# EAGLE board board (EAGLE 6.4)
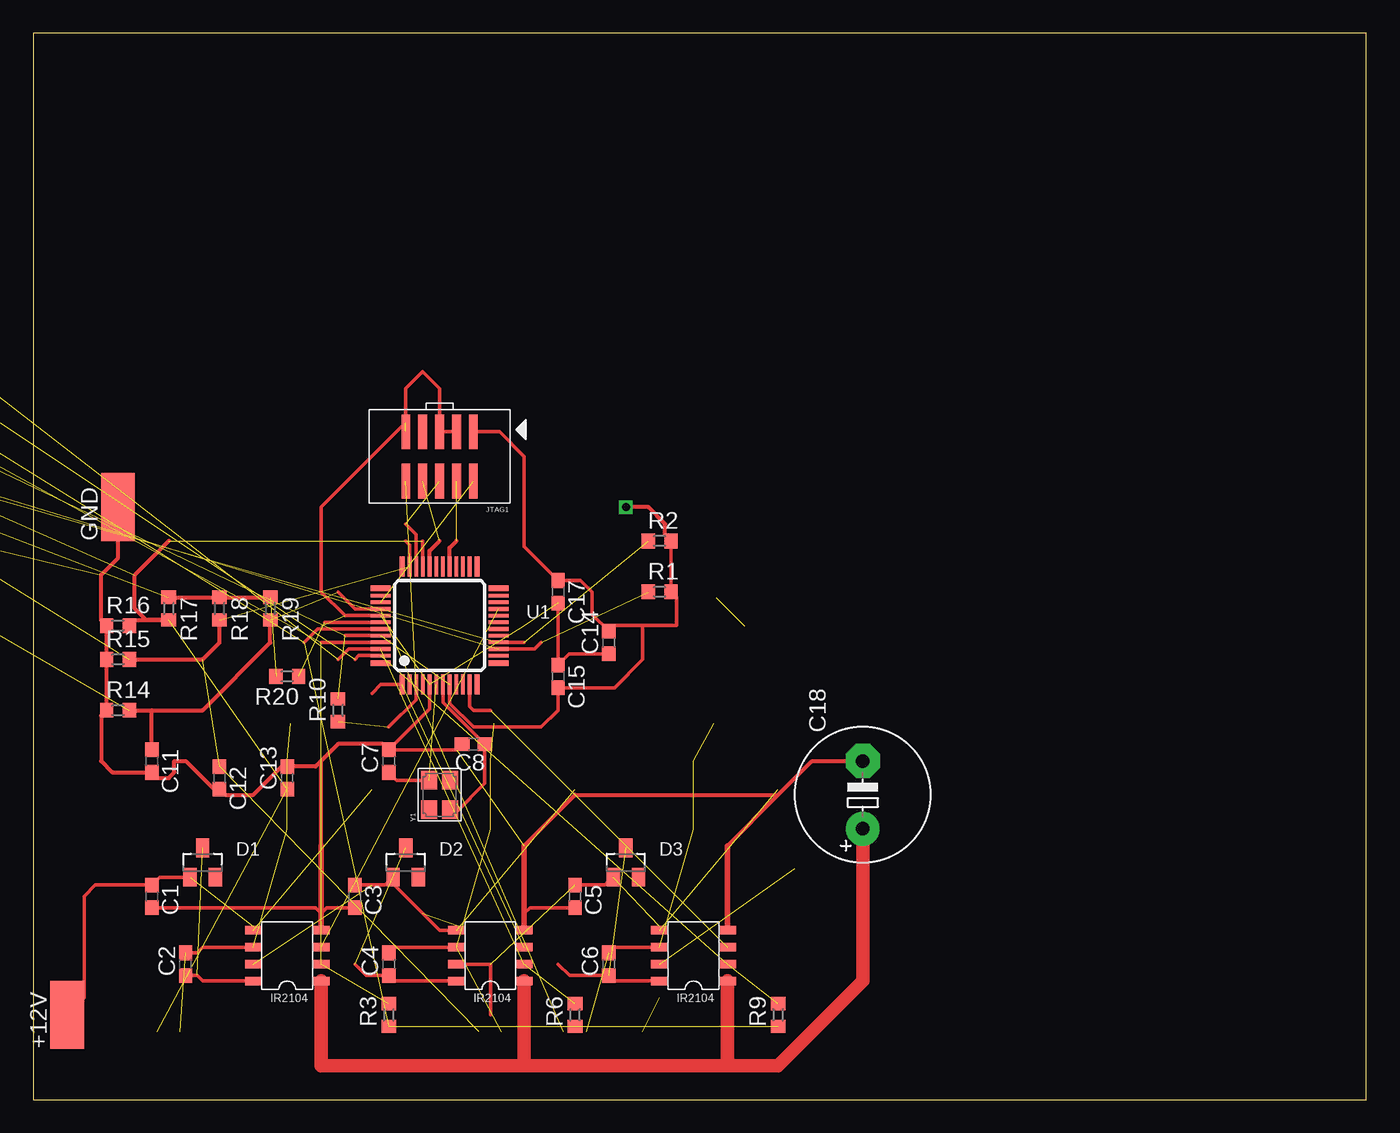
[diagram p0: board, top side]
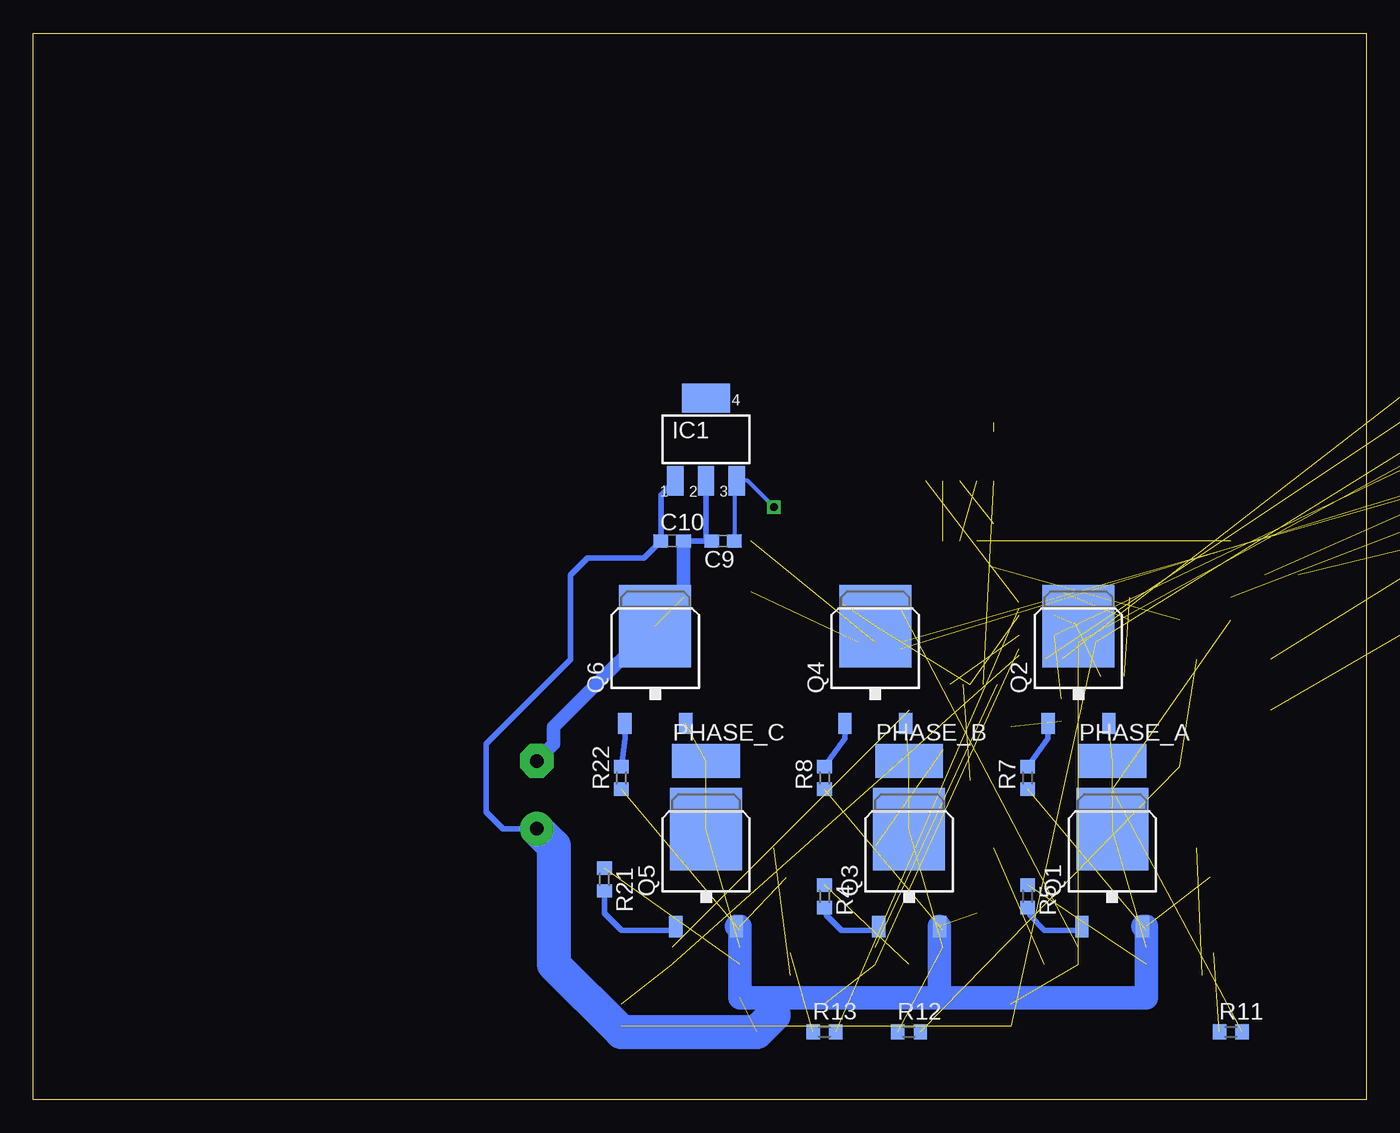
[diagram p1: board, bottom side, seen from below]

Size 100 x 80 mm. Coordinates in mm from the lower left corner, seen from the top.
Outline: 0,0 100,0 100,80 0,80 0,0
Copper layers (1*16): Top 0.035mm / dielectric 1.5mm / Bottom 0.035mm
Design rules "default": minimum track width 10mil, minimum drill 24mil, track to track 8mil, track to pad 8mil, pad to pad 8mil, via to via 8mil, smd to smd 8mil, copper to edge 40mil, drill to drill 8mil, minimum pad ring 10mil, minimum via ring 8mil, stop-mask expansion 4mil, vias tented up to drill 0mil, thermal gap 10mil

## Footprints (pad centres in the part's own frame; a part is rotated, then mirrored left to right if it is on the bottom)
SMD2,54-5,08 = smd 2.54 x 5.08: 1 0,0
C0603 = smd 1.1 x 1: 1 -0.85,0; 2 0.85,0
E5-10,5 = drill 1.016 pad 2.54: + -2.54,0 | drill 1.016 pad 2.54 octagon: - 2.54,0
SOT23 = smd 1 x 1.4: 1 -0.95,-1.1; 2 0.95,-1.1; 3 0,1.1
SOT223 = smd 1.219 x 2.235: 1 -2.311,-3.099; 2 0,-3.099; 3 2.311,-3.099 | smd 3.6 x 2.2: 4 0,3.099
1X01 = drill 1.016 octagon: 1 0,0
2X05_1.27MM_SMT = smd 0.65 x 2.6: 1 -2.54,-1.85; 2 -2.54,1.85; 3 -1.27,-1.85; 4 -1.27,1.85; 5 0,-1.85; 6 0,1.85; 7 1.27,-1.85; 8 1.27,1.85; 9 2.54,-1.85; 10 2.54,1.85
D-PAK_TO252AA = smd 1 x 1.6: 1 -2.28,-4.8; 3 2.28,-4.8 | smd 5.4 x 6.2: 4 0,2.5
R0603 = smd 1 x 1.1: 1 -0.85,0; 2 0.85,0
SOT313-2 = smd 0.4 x 1.5: 1 -2.81,-4.425; 12 2.81,-4.425; 25 2.81,4.425; 36 -2.81,4.425 | smd 0.28 x 1.5: 2 -2.25,-4.425; 3 -1.75,-4.425; 4 -1.25,-4.425; 5 -0.75,-4.425; 6 -0.25,-4.425; 7 0.25,-4.425; 8 0.75,-4.425; 9 1.25,-4.425; 10 1.75,-4.425; 11 2.25,-4.425; 26 2.25,4.425; 27 1.75,4.425; 28 1.25,4.425; 29 0.75,4.425; 30 0.25,4.425; 31 -0.25,4.425; 32 -0.75,4.425; 33 -1.25,4.425; 34 -1.75,4.425; 35 -2.25,4.425 | smd 1.5 x 0.4: 13 4.425,-2.81; 24 4.425,2.81; 37 -4.425,2.81; 48 -4.425,-2.81 | smd 1.5 x 0.28: 14 4.425,-2.25; 15 4.425,-1.75; 16 4.425,-1.25; 17 4.425,-0.75; 18 4.425,-0.25; 19 4.425,0.25; 20 4.425,0.75; 21 4.425,1.25; 22 4.425,1.75; 23 4.425,2.25; 38 -4.425,2.25; 39 -4.425,1.75; 40 -4.425,1.25; 41 -4.425,0.75; 42 -4.425,0.25; 43 -4.425,-0.25; 44 -4.425,-0.75; 45 -4.425,-1.25; 46 -4.425,-1.75; 47 -4.425,-2.25
IR2104S = smd 1.27 x 0.635: 1 0,3.81; 2 0,2.54; 3 0,1.27; 4 0,0; 5 5.08,0; 6 5.08,1.27; 7 5.08,2.54; 8 5.08,3.81
CRYSTAL_3.2X2.5 = smd 1.4 x 1.2: 1 -1.1,-0.8; 2 1.1,0.8; GND1 -1.1,0.8; GND2 1.1,-0.8

## Placement (x,y rotation side)
+12V  [SMD2,54-5,08]  2.54,6.35 0 top
C1  100nF  [C0603]  8.89,15.24 270 top
C2  220nF  [C0603]  11.43,10.16 90 top
C3  100nF  [C0603]  24.13,15.24 270 top
C4  220nF  [C0603]  26.67,10.16 90 top
C5  100nF  [C0603]  40.64,15.24 270 top
C6  220nF  [C0603]  43.18,10.16 90 top
C7  18pF  [C0603]  26.67,25.4 90 top
C8  18pF  [C0603]  33.02,26.67 180 top
C9  1µF  [C0603]  48.26,41.91 180 bottom
C10  1µF  [C0603]  52.07,41.91 0 bottom
C11  100nF  [C0603]  8.89,25.4 270 top
C12  100nF  [C0603]  13.97,24.13 270 top
C13  100nF  [C0603]  19.05,24.13 90 top
C14  100nF  [C0603]  43.18,34.29 90 top
C15  100nF  [C0603]  39.37,31.75 270 top
C17  1µF  [C0603]  39.37,38.1 270 top
C18  330uF  [E5-10,5]  62.23,22.86 90 top
D1  BAS21  [SOT23]  12.7,17.78 0 top
D2  BAS21  [SOT23]  27.94,17.78 0 top
D3  BAS21  [SOT23]  44.45,17.78 0 top
GND  [SMD2,54-5,08]  6.35,44.45 0 top
IC1  MCP1703DB  [SOT223]  49.53,49.53 0 bottom
JP1  [1X01]  -31.75,63.5 0 top  (outside the outline)
JP2  [1X01]  -36.83,63.5 0 top  (outside the outline)
JP4  [1X01]  -41.91,63.5 0 top  (outside the outline)
JP5  [1X01]  -46.99,63.5 0 top  (outside the outline)
JP6  [1X01]  -52.07,63.5 0 top  (outside the outline)
JP7  [1X01]  -57.15,63.5 0 top  (outside the outline)
JP8  [1X01]  -62.23,63.5 0 top  (outside the outline)
JP9  [1X01]  -67.31,63.5 0 top  (outside the outline)
JP12  [1X01]  -68.58,57.15 0 top  (outside the outline)
JP13  [1X01]  -16.51,63.5 0 top  (outside the outline)
JP14  [1X01]  -21.59,63.5 0 top  (outside the outline)
JP15  [1X01]  -26.67,63.5 0 top  (outside the outline)
JTAG1  [2X05_1.27MM_SMT]  30.48,48.26 180 top
PHASE_A  [SMD2,54-5,08]  19.05,25.4 270 bottom
PHASE_B  [SMD2,54-5,08]  34.29,25.4 270 bottom
PHASE_C  [SMD2,54-5,08]  49.53,25.4 270 bottom
Q1  IRLR7843  [D-PAK_TO252AA]  19.05,17.78 0 bottom
Q2  IRLR7843  [D-PAK_TO252AA]  21.59,33.02 0 bottom
Q3  IRLR7843  [D-PAK_TO252AA]  34.29,17.78 0 bottom
Q4  IRLR7843  [D-PAK_TO252AA]  36.83,33.02 0 bottom
Q5  IRLR7843  [D-PAK_TO252AA]  49.53,17.78 0 bottom
Q6  IRLR7843  [D-PAK_TO252AA]  53.34,33.02 0 bottom
R1  1k  [R0603]  46.99,38.1 0 top
R2  1k  [R0603]  46.99,41.91 0 top
R3  1k  [R0603]  26.67,6.35 90 top
R4  33  [R0603]  40.64,15.24 270 bottom
R5  33  [R0603]  25.4,15.24 270 bottom
R6  1k  [R0603]  40.64,6.35 90 top
R7  33  [R0603]  25.4,24.13 90 bottom
R8  33  [R0603]  40.64,24.13 90 bottom
R9  1k  [R0603]  55.88,6.35 90 top
R10  1k  [R0603]  22.86,29.21 90 top
R11  12k  [R0603]  10.16,5.08 0 bottom
R12  12k  [R0603]  34.29,5.08 0 bottom
R13  12k  [R0603]  40.64,5.08 0 bottom
R14  4k7  [R0603]  6.35,29.21 0 top
R15  4k7  [R0603]  6.35,33.02 0 top
R16  4k7  [R0603]  6.35,35.56 0 top
R17  4k7  [R0603]  10.16,36.83 270 top
R18  4k7  [R0603]  13.97,36.83 270 top
R19  4k7  [R0603]  17.78,36.83 270 top
R20  1k  [R0603]  19.05,31.75 180 top
R21  33  [R0603]  57.15,16.51 270 bottom
R22  33  [R0603]  55.88,24.13 90 bottom
U1  LPC1317FBD48  [SOT313-2]  30.48,35.56 0 top
U$1  IR2104S  [IR2104S]  21.59,12.7 180 top
U$2  IR2104S  [IR2104S]  36.83,12.7 180 top
U$3  IR2104S  [IR2104S]  52.07,12.7 180 top
Y1  12MHZ  [CRYSTAL_3.2X2.5]  30.48,22.86 90 top

## Library data of the parts
+12V GND PHASE_A PHASE_B PHASE_C = wirepad
C1-C15 C17 R1-R22 = resistor
C18 = rcl
D1-D3 = nxp_60_1_1
IC1 = linear
JP1 JP2 JP4-JP9 JP12-JP15 = pinhead
JTAG1 Y1 = microbuilder
Q1-Q6 = transistor-power
U1 = nxp_60_1_1; EEPROM: 4kB; FLASH: 64kB; GPIO: 40; SRAM0: 8kB; SRAM1: 2kB; SRAM_USB: -; USB: -
U$1-U$3 = ir-2104

## Nets
+3V3: C9.1 C14.2 C15.2 C17.1 IC1.3 JP2.1 JTAG1.1 R1.2 R2.2 R10.2 U1.8 U1.44
+12V: +12V.1 C1.1 C3.1 C5.1 C10.1 C18.+ D1.1 D2.1 D3.1 IC1.1 Q1.3 Q3.3 Q5.3 U$1.1 U$2.1 U$3.1
AVG: JP7.1 R17.1 R18.1 R19.1 R20.2
GND: C1.2 C3.2 C5.2 C7.2 C8.2 C9.2 C10.2 C11.2 C12.2 C13.2 C14.1 C15.1 C17.2 C18.- GND.1 IC1.2 JP12.1 JTAG1.3 JTAG1.5 JTAG1.9 Q2.4 Q4.4 Q6.4 R14.1 R15.1 R16.1 U1.5 U1.41 U$1.4 U$2.4 U$3.4
IN_A: JP1.1 R3.2 U1.45 U$1.2
IN_B: JP13.1 R6.2 U1.46 U$2.2
IN_C: JP14.1 R9.2 U1.47 U$3.2
N$1: Q1.1 R5.2
N$2: Q2.1 R7.2
N$3: R21.1 U$3.7
N$4: Q5.1 R21.2
N$5: R20.1 U1.42
N$6: C7.1 U1.6 Y1.2
N$7: C8.1 U1.7 Y1.1
N$8: R4.1 U$2.7
N$10: C2.1 D1.3 U$1.8
N$11: Q4.1 R8.2
N$12: R22.1 U$3.5
N$13: Q3.1 R4.2
N$14: R8.1 U$2.5
N$15: R7.1 U$1.5
N$16: R5.1 U$1.7
N$17: C4.1 D2.3 U$2.8
N$20: Q6.1 R22.2
N$26: C6.1 D3.3 U$3.8
NULL_A: C13.1 JP5.1 R11.2 R16.2 R17.2 U1.33
NULL_B: C12.1 JP4.1 R12.2 R15.2 R18.2 U1.35
NULL_C: C11.1 JP6.1 R13.2 R14.2 R19.2 U1.40
PHASE_A: C2.2 PHASE_A.1 Q1.4 Q2.3 R11.1 U$1.6
PHASE_B: C4.2 PHASE_B.1 Q3.4 Q4.3 R12.1 U$2.6
PHASE_C: C6.2 PHASE_C.1 Q5.4 Q6.3 R13.1 U$3.6
PWM: JP15.1 R3.1 R6.1 R9.1 U1.43
RESET: JTAG1.10 R10.1 U1.3
SCL: JP8.1 R1.1 U1.15
SD_A: U1.21 U$1.3
SD_B: U1.1 U$2.3
SD_C: U1.11 U$3.3
SDA: JP9.1 R2.1 U1.16
SWCLK: JTAG1.4 U1.29
SWDIO: JTAG1.2 U1.39
TDI: JTAG1.8 U1.32
TDO: JTAG1.6 U1.34

## Tracks (layer width: path | path; a pad name or v marks a point on that pad's centre or on a via)
+3V3  (via drill 0.6)  (3 unrouted)
  Top 0.254: U1.8 31.23,29.73 33.02,27.94 38.1,27.94 39.37,29.21 C15.2 43.6,30.9 45.72,33.02 45.72,35.56 | U1.44 23.38,34.81 | 45.72,35.56 43.6,35.56 C14.2 41.91,36.41 41.91,38.1 41.06,38.95 C17.1 36.83,41.49 36.83,48.26 34.98,50.11 JTAG1.1 | 45.72,35.56 48.26,35.56 48.26,37.68 R1.2 R2.2
  Top 0.305: R2.2 47.41,42.34 47.41,43.18 46.14,44.45 v44.45,44.45
  Bottom 0.305: C9.1 47.41,46.24 IC1.3 46.43,46.43 v44.45,44.45
+12V  (4 unrouted)
  Top 0.254: +12V.1 3.81,7.62 3.81,15.24 4.66,16.09 C1.1 9.48,16.68 D1.1 | 29.21,13.97 26.99,16.19 D2.1 26.4,16.09 C3.1 | C5.1 42.91,16.09 D3.1
  Top 1.016: U$1.1 21.59,2.54 36.83,2.54 | U$2.1 36.83,2.54 | U$3.1 52.07,2.54 | 52.07,2.54 36.83,2.54 | 52.07,2.54 55.88,2.54 62.23,8.89 C18.+
  Bottom 0.406: IC1.1 52.92,45.35 C10.1 54.19,40.64 58.42,40.64 59.69,39.37 59.69,33.02 66.04,26.67 66.04,21.59 64.77,20.32 C18.+
  Bottom 1.778: Q1.3 16.51,12.98 16.51,7.62 32.01,7.62 | 32.01,7.62 Q3.3 | Q5.3 46.99,12.98 46.99,7.62 32.01,7.62
  Bottom 2.54: C18.+ 60.96,19.05 60.96,10.16 55.88,5.08 45.72,5.08 44.45,6.35
AVG  (2 unrouted)
  Top 0.305: R17.1 R18.1 R19.1
GND  (8 unrouted)
  Top 0.254: U1.5 29.73,29.31 C7.2 31.75,26.25 C8.2 | C17.2 C15.1 40.21,33.44 C14.1 | JTAG1.3 JTAG1.5 30.48,53.34 29.21,54.61 27.94,53.34 27.94,50.8 21.59,44.45 21.59,38.1 23.38,36.31 U1.41 | C1.2 21.17,14.39 21.59,13.97 22.01,14.39 C3.2 | C5.2 37.25,14.39 36.83,13.97
  Top 0.305: GND.1 6.35,40.64 5.08,39.37 5.08,35.98 R16.1 R15.1 R14.1 5.08,28.79 5.08,25.4 5.93,24.55 C11.2 9.31,24.13 10.16,24.13 10.58,24.55 10.58,25.4 11.43,25.4 13.55,23.28 C12.2 14.39,22.86 16.51,22.86 18.63,24.98 C13.2 21.17,24.98 21.59,25.4 | C7.2 26.25,26.67 22.86,26.67 21.59,25.4 | 21.59,19.05 21.59,25.4 | 52.07,19.05 55.88,22.86 | 55.88,22.86 58.42,25.4 C18.- | 36.83,19.05 40.64,22.86 55.88,22.86
  Top 0.406: U$1.4 21.59,13.97 21.59,19.05 | U$2.4 36.83,13.97 36.83,19.05 | U$3.4 52.07,19.05
  Bottom 0.406: C9.2 49.53,41.91 | IC1.2 49.53,41.91 | 49.53,41.91 C10.2
  Bottom 1.016: C10.2 51.22,37.68 60.96,27.94 60.96,26.67 C18.-
IN_A  (3 unrouted)
  Top 0.254: U1.45 26.04,34.29 21.59,34.29
IN_B  (3 unrouted)
  Top 0.254: U1.46 23.65,33.81 22.86,33.02
IN_C  (3 unrouted)
  Top 0.254: U1.47 24.42,33.31 24.13,33.02
N$1
  Bottom 0.406: R5.2 25.25,13.82 24.13,12.7 21.61,12.7 Q1.1
N$2
  Bottom 0.406: Q2.1 23.87,27.08 R7.2
N$3  (1 unrouted)
N$4
  Bottom 0.406: R21.2 57.15,13.97 55.88,12.7 52.09,12.7 Q5.1
N$5  (1 unrouted)
  Top 0.254: U1.42 21.84,35.81
N$6  (1 unrouted)
  Top 0.254: C7.1 27.26,23.96 Y1.2
N$7
  Top 0.254: U1.7 30.73,29.81 C8.1 33.87,23.71 31.75,21.59 31.45,21.59 Y1.1
N$8  (1 unrouted)
  Top 0.254: U$2.7 34.29,10.16 34.29,6.35
N$10  (1 unrouted)
  Top 0.254: C2.1 12.28,9.31 12.7,8.89 U$1.8
N$11
  Bottom 0.406: Q4.1 39.11,27.08 R8.2
N$12  (1 unrouted)
N$13
  Bottom 0.406: R4.2 40.49,13.82 39.37,12.7 36.85,12.7 Q3.1
N$14  (1 unrouted)
  Top 0.254: U$2.5 30.48,12.7 29.21,13.97
N$15  (1 unrouted)
N$16  (1 unrouted)
N$17  (1 unrouted)
  Top 0.254: U$2.8 27.09,8.89 C4.1 24.98,9.31 24.13,10.16
N$20
  Bottom 0.406: Q6.1 55.62,27.08 R22.2
N$26  (1 unrouted)
  Top 0.254: U$3.8 43.6,8.89 C6.1 40.22,9.31 39.37,10.16
NULL_A  (4 unrouted)
  Top 0.254: U1.33 29.21,40.01 29.21,41.91
  Top 0.305: R16.2 7.62,35.98 R17.2 8.47,35.98 7.62,36.83 7.62,39.37 10.16,41.91
NULL_B  (4 unrouted)
  Top 0.254: U1.35 28.23,41.62 27.94,41.91
  Top 0.305: R15.2 12.7,33.02 13.97,34.29 R18.2
NULL_C  (3 unrouted)
  Top 0.254: U1.40 24.15,36.81 22.86,38.1
  Top 0.305: R14.2 8.89,29.21 | 8.89,29.21 12.7,29.21 17.78,34.29 R19.2 | C11.1 8.89,29.21
PHASE_A  (4 unrouted)
  Top 0.254: C2.2 12.28,11.01 12.7,11.43 U$1.6
PHASE_B  (4 unrouted)
  Top 0.254: U$2.6 27.09,11.43 C4.2
PHASE_C  (4 unrouted)
  Top 0.254: U$3.6 43.6,11.43 C6.2
PWM  (4 unrouted)
  Top 0.254: U1.43 21.34,35.31 20.32,34.29
RESET  (2 unrouted)
  Top 0.254: U1.3 28.73,30 26.67,27.94
SCL  (2 unrouted)
  Top 0.254: U1.15 37.62,33.81 38.1,34.29
SD_A  (1 unrouted)
SD_B  (1 unrouted)
  Top 0.254: U1.1 26.05,31.14 25.4,30.48
SD_C  (1 unrouted)
  Top 0.254: U1.11 32.73,29.5 33.02,29.21 34.29,29.21
SDA  (2 unrouted)
  Top 0.254: U1.16 34.92,34.29 36.83,34.29
SWCLK  (1 unrouted)
  Top 0.305: U1.29 31.23,41.39 31.75,41.91
SWDIO  (1 unrouted)
TDI  (1 unrouted)
  Top 0.305: U1.32 29.73,41.16 30.48,41.91
TDO  (1 unrouted)
  Top 0.254: U1.34 28.73,42.39 27.94,43.18